# Altium PCB HandModule.PcbDoc
Units mil, origin at the board's own origin, x right, y up, seen from the top; angles counter-clockwise.
Board outline 1560 x 1180 mil, 2 copper layers (Top1, Bottom2), stack 63.824 mil thick; 53 components, 70 nets, 267 pads, 173 vias.
Unrouted connection lines stored in the file: 57.
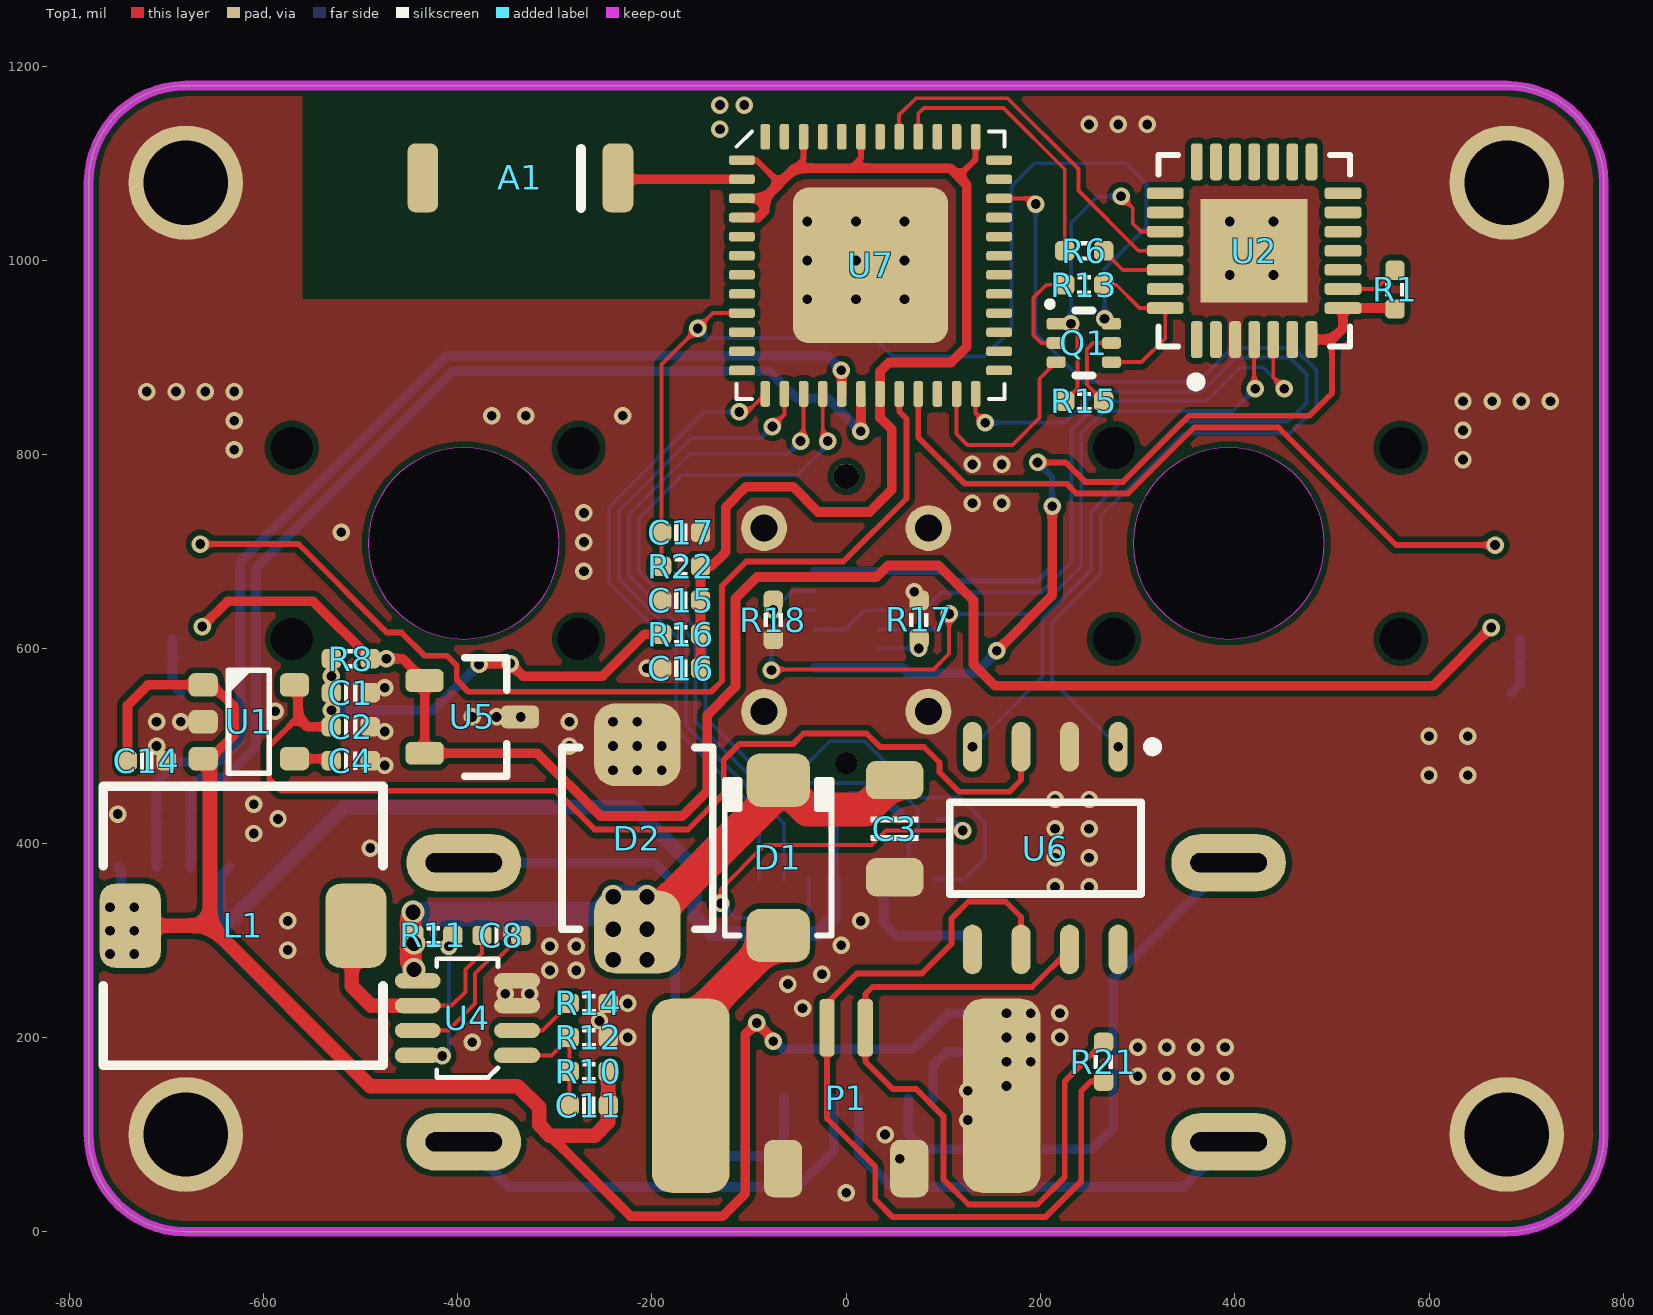
[diagram p0: Top1 view]
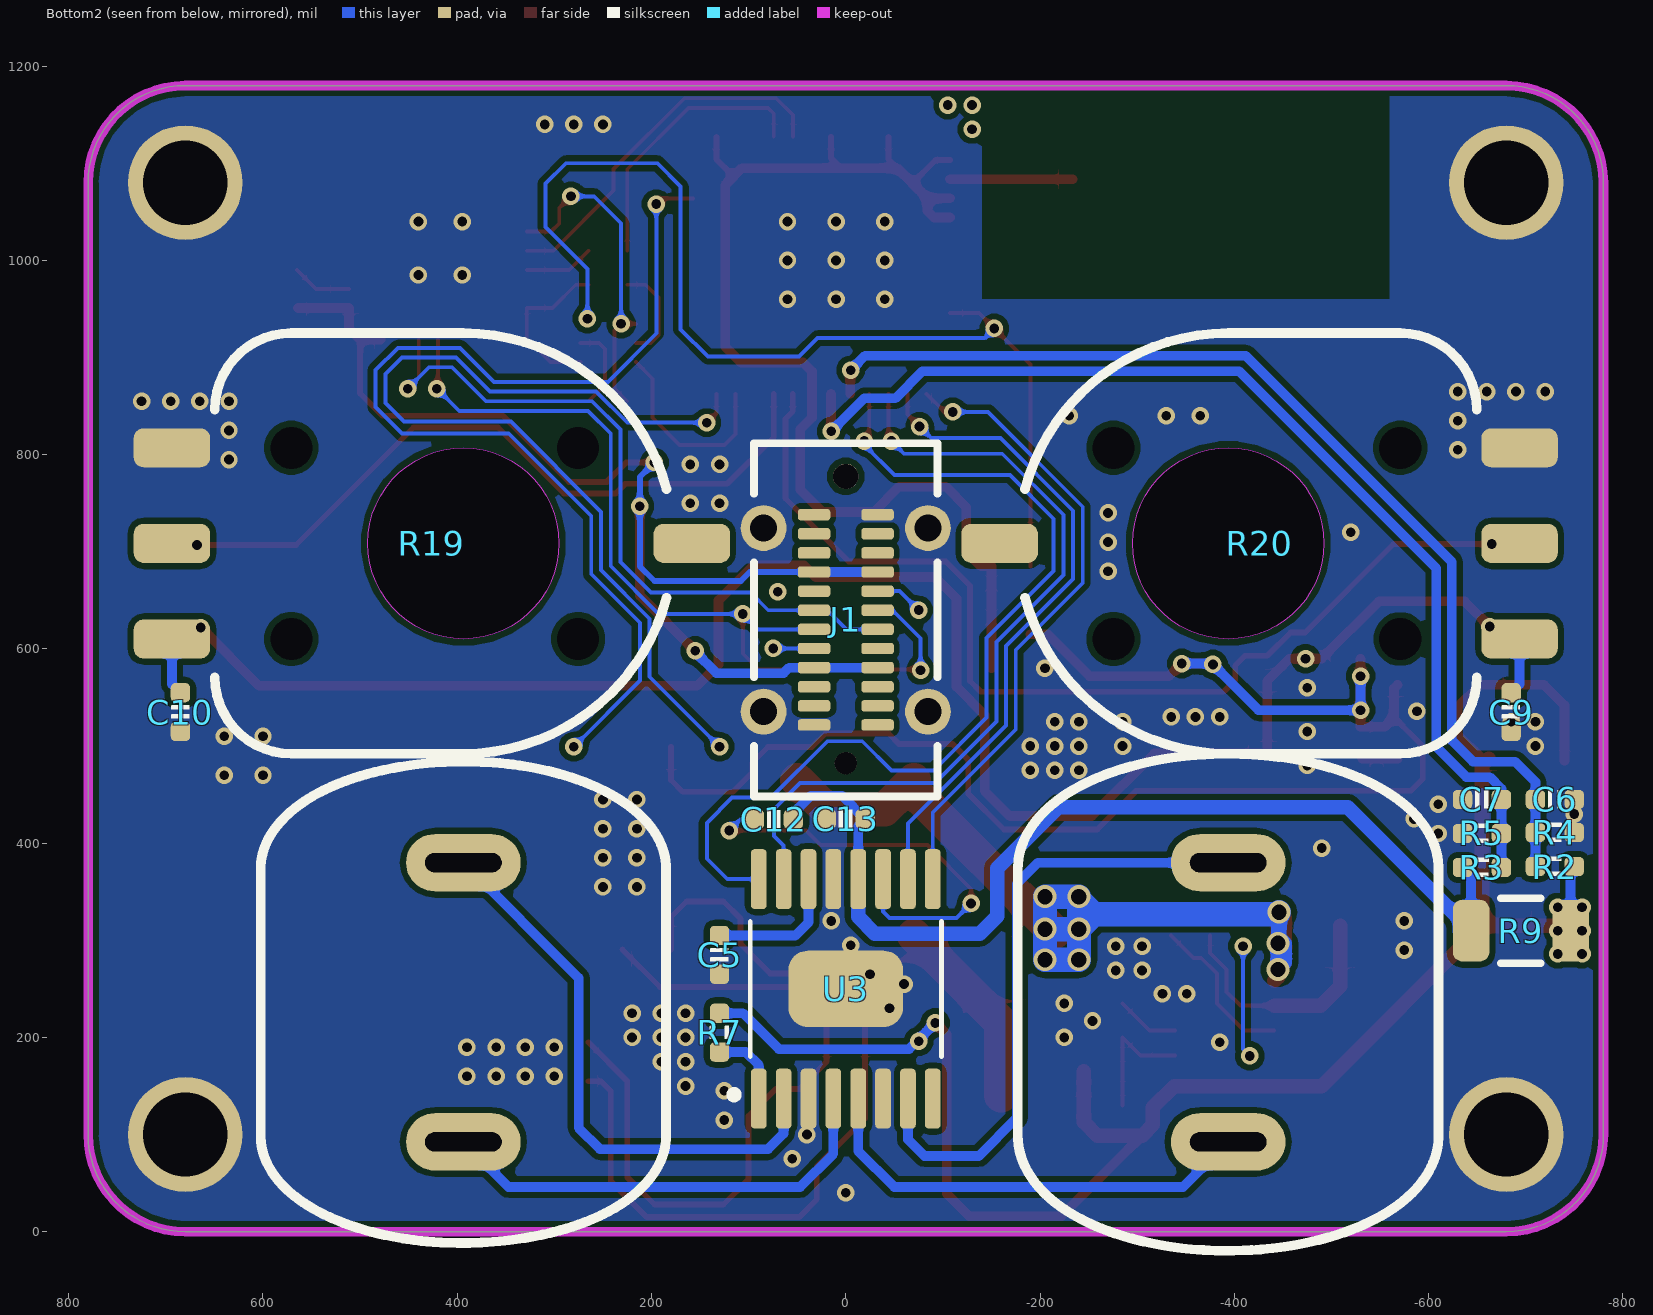
[diagram p1: Bottom2 view, seen from below]
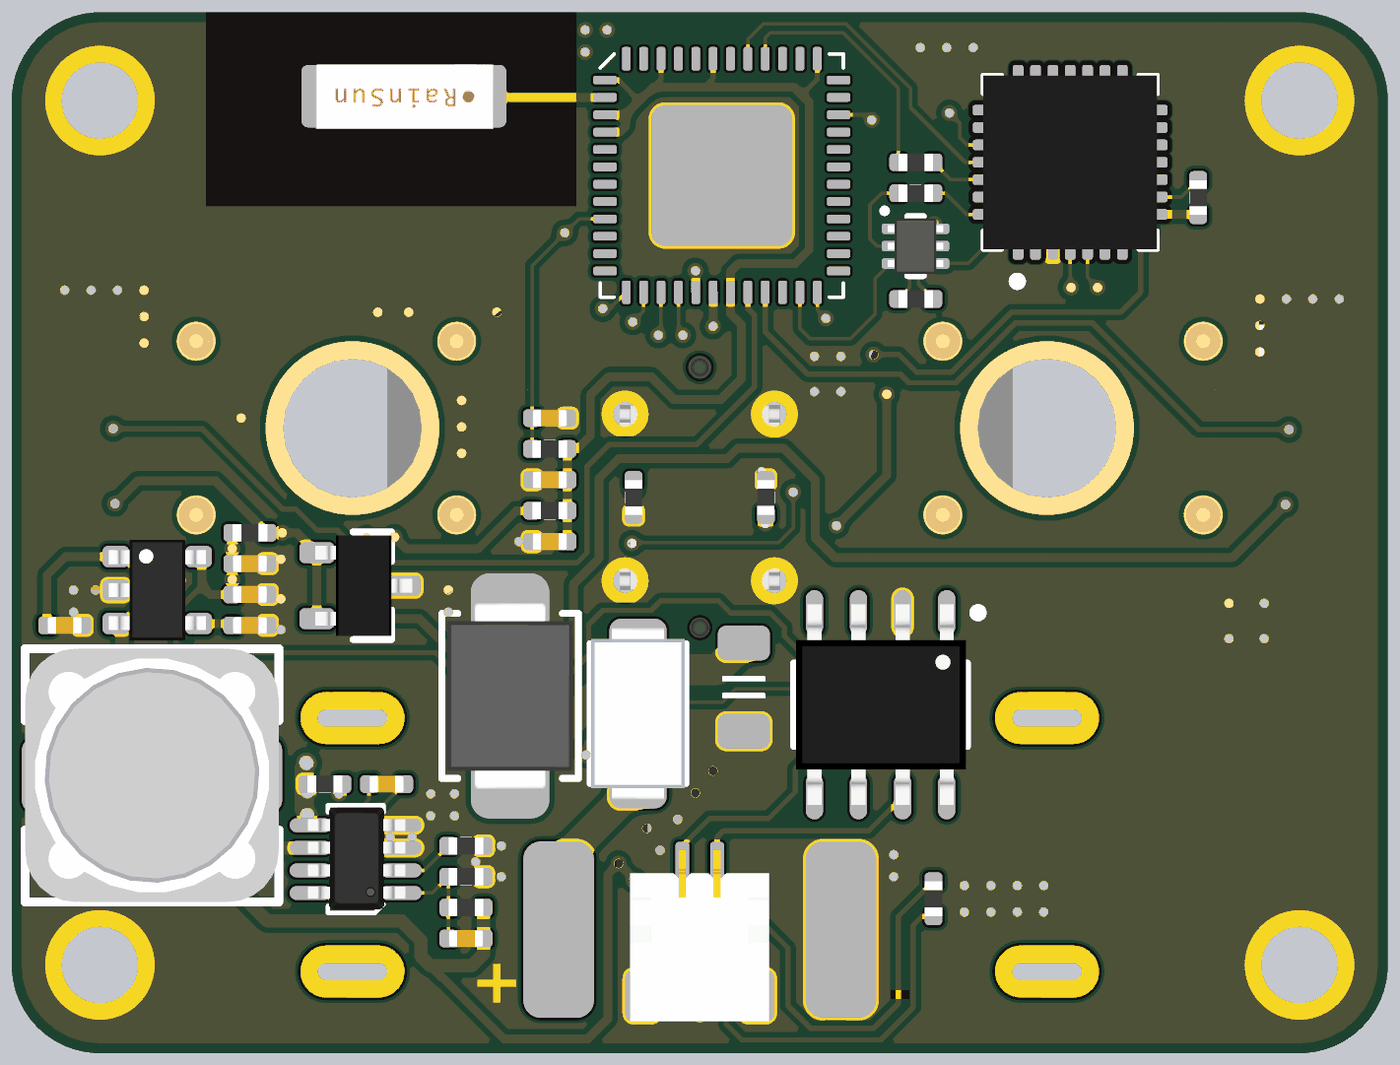
[diagram p2: 3D render of the assembled board from above, using the file's embedded part models]
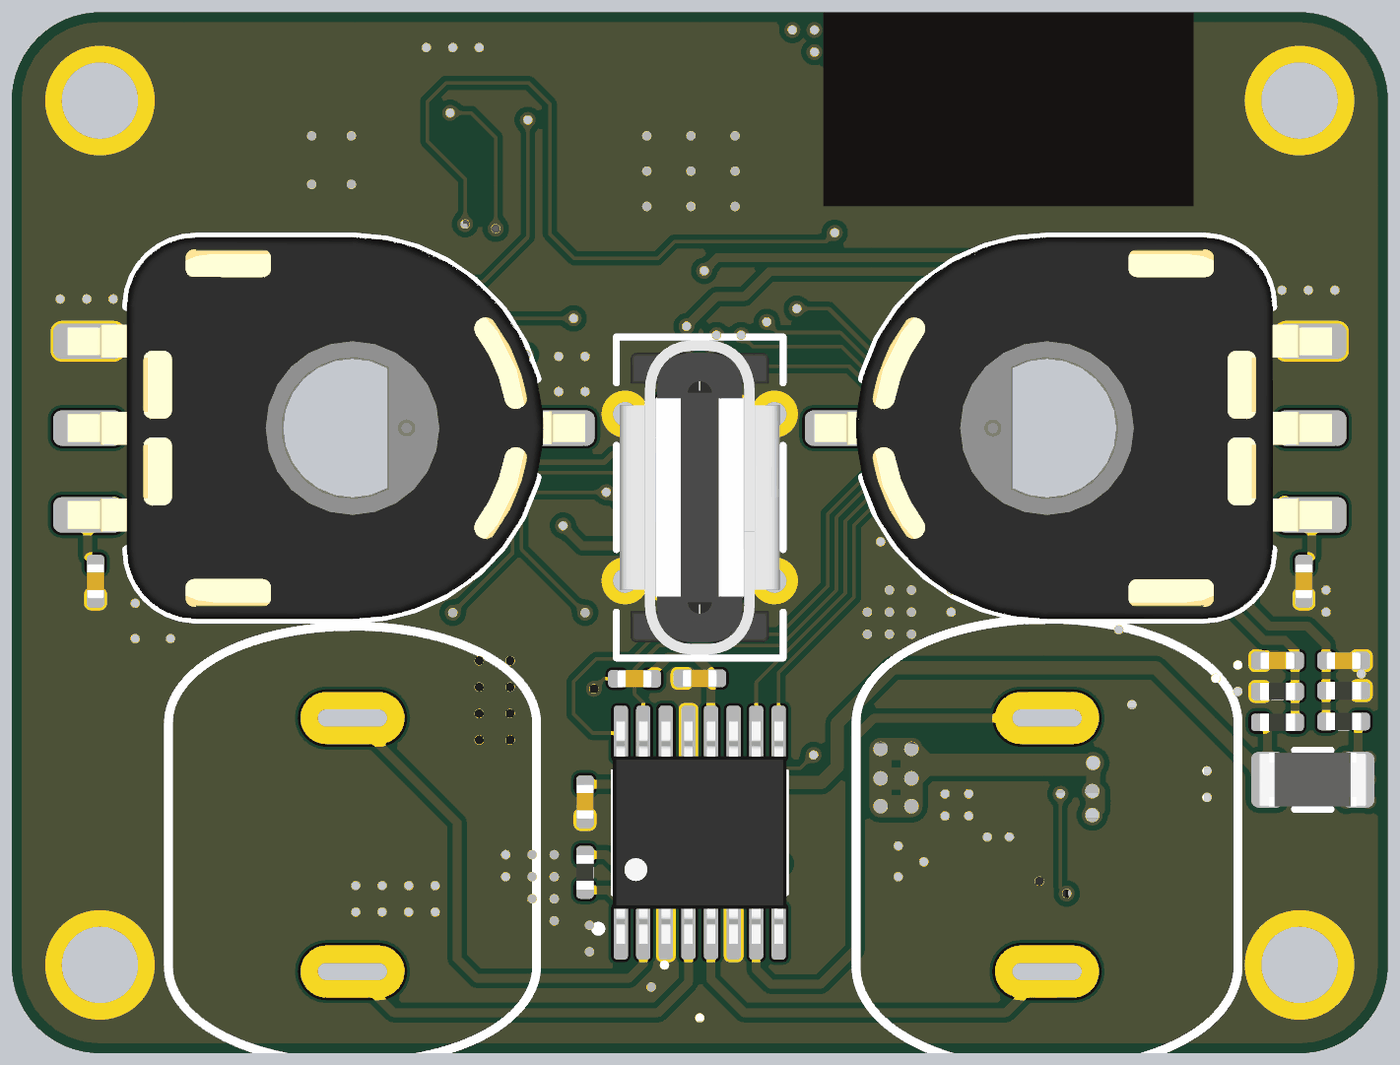
[diagram p3: 3D render of the assembled board from below, using the file's embedded part models]

## Layer stack, top to bottom
Top Solder: solder mask 0.4, Solder Resist, Dk 3.5
Top1: signal copper 1.4
Dielectric1: core 61.0236, FR-4, Dk 4.2
Bottom2: signal copper 1.4
Bottom Solder: solder mask 0.4, Solder Resist, Dk 3.5

## Board outline
-780,100 ccw(c-680,100) -680,0 680,0 ccw(c680,100) 780,100 780,1080 ccw(c680,1080) 680,1180 -680,1180 ccw(c-680,1080) -780,1080
cut-out: 295.28,708.66 ccw(c393.7,708.66) 393.7,610.24 ccw(c393.7,708.66) 492.13,708.66 ccw(c393.7,708.66) 393.7,807.09 ccw(c393.7,708.66)
cut-out: -492.13,708.66 ccw(c-393.7,708.66) -393.7,610.24 ccw(c-393.7,708.66) -295.28,708.66 ccw(c-393.7,708.66) -393.7,807.09 ccw(c-393.7,708.66)

## Design rules (kind name [scope] priority, off if disabled: settings)
Clearance Clearance_Logo [InNetClass('Logo')] p1: gap=8 ignorepadtopadclearanceinfootprint=FALSE
Clearance [All] p2: gap=6 ignorepadtopadclearanceinfootprint=FALSE
ComponentClearance [All] p1: gap=0 collisioncheckmode=3 verticalgap=0 showdistances=FALSE
DiffPairsRouting [All] p1: maxlimit=9 minlimit=9 mostfreqgap=9 toplayer_minwidth=15 toplayer_maxwidth=15 toplayer_prefwidth=15 bottomlayer_minwidth=15 bottomlayer_maxwidth=15 bottomlayer_prefwidth=15 maxuncoupledlength=500
FanoutControl Fanout_BGA [All] p1: bgadir=Out bgaviamode=Centered fanoutstyle=Auto fanoutdirection=Alternating viagrid=1 // Fanout_BGA (Default Rule)
HoleSize [All] p1: absolutevalues=TRUE maxlimit=10000 minlimit=8 maxpercent=80.000 minpercent=20.000
MinimumSolderMaskSliver [All] p1 off: minsoldermaskwidth=2
PlaneClearance [All] p1: clearance=8
PlaneConnect [All] p1: planeconnectstyle=Direct reliefexpansion=20 reliefentries=4 reliefconductorwidth=10 reliefairgap=10
PolygonConnect [All] p1: connectstyle=Direct reliefconductorwidth=10 reliefentries=4 polygonreliefangle="90 Angle" airgapwidth=10
RoutingVias [All] p1: holewidth=8 width=16 viastyle="Through Hole" minholewidth=6 minwidth=12 maxholewidth=28 maxwidth=50
SilkToSilkClearance [All] p1: silktosilkclearance=0
SilkToSolderMaskClearance [IsPad] p1: minsilkscreentomaskgap=0 clearancetoexposedcopper=TRUE
SolderMaskExpansion [All] p1: expansion=3 istentingtop=FALSE
Width Logo [InNetClass('Logo')] p1: maxlimit=100 minlimit=0.1 preferedwidth=10
Width GND [(InNet('AGND') OR InNet('GND'))] p2: maxlimit=50 minlimit=4 preferedwidth=10
Width VCC [(InNet('VDD_SYS_3.3V') OR InNet('VDD_AV_3.3V') OR InNet('VDD_5V') OR InNet('VDD1V2-SYS') OR InNet('VDD1V1-EPHY') OR InNet('VDD-CPUX') OR InNet('VDD-CPUS') OR InNet('VDD-CPUFB') OR InNet('VCC-DRAM'))] p3: maxlimit=50 minlimit=4 preferedwidth=10
Width [All] p4: maxlimit=10000 minlimit=4 preferedwidth=4
21 further rules are at their usual default settings.

## Components (designator, comment, footprint, x,y, rotation, side; value= is the part's Value field where it differs from the comment)
A1 "RAINSUN" ANT-Rainsun-AN5120 -335,1085 r180 top
C1 "0.1uF" CAP_0402 -510,555 r180 top value=0.1u
C2 "10uF" CAP_0402 -510,520 r180 top value=0.1u
C3 "100uF" 1206-CAP 50,415 r90 top value=0.1u
C4 "10nF" CAP_0402 -510,485 r180 top value=0.1u
C5 "2.2uF" CAP_0402 130,285 r90 bottom value=0.1u
C6 "10uF" CAP_0402 -730,445 r0 bottom value=0.1u
C7 "10uF" CAP_0402 -655,445 r180 bottom value=0.1u
C8 "10nF" CAP_0402 -355,305 r0 top value=0.1u
C9 "10uF" CAP_0402 -685,535 r90 bottom value=0.1u
C10 "10uF" CAP_0402 685,535 r90 bottom value=0.1u
C11 "12pF" CAP_0402 -265,130 r180 top value=0.1u
C12 "10nF" CAP_0402 74,424.5 r0 bottom value=0.1u
C13 "10uF" CAP_0402 0,425 r180 bottom value=0.1u
C14 "100uF" CAP_0402 -720,485 r180 top value=0.1u
C15 "10uF" CAP_0402 -170,650 r0 top value=0.1u
C16 "0.1uF" CAP_0402 -170,580 r0 top value=0.1u
C17 "1uF" CAP_0402 -170,720 r0 top value=0.1u
D1 "SS54" DO-214AC -70,385 r90 top
D2 "SMBJ28CA" SMBJ-CA_MFG -215,405 r270 top
J1 "USB-TYPE-C-STAND" USB-TYPE-C-STAND 0,630 r270 bottom locked
L1 "2.2uH" IND_CD74 -621,315 r180 top
P1 "SH1.0-2P" SH1.0-2P 0,210 r0 top
Q1 "BC847BVC-7" SOT563-6 244.63,915 r270 top
R1 "10K" RES_0402 565,970 r90 top value=22R
R2 "20K" RES_0402 -730,376 r180 bottom value=22R
R3 "20K" RES_0402 -655,375 r0 bottom value=22R
R4 "10K" RES_0402 -730,411 r0 bottom value=22R
R5 "10K" RES_0402 -655,410 r180 bottom value=22R
R6 "200R" RES_0402 245,1010 r0 top value=22R
R7 "47K" RES_0402 130,205 r90 bottom value=22R
R8 "120R" RES_0402 -510,590 r0 top value=22R
R9 "1R" 1206-RES -695,310 r180 bottom value=22R
R10 "110K" RES_0402 -265,165 r180 top value=22R
R11 "47K" RES_0402 -425,305 r0 top value=22R
R12 "15K" RES_0402 -265,200 r0 top value=22R
R13 "12K" RES_0402 245,975 r180 top value=22R
R14 "47K" RES_0402 -265,235 r0 top value=22R
R15 "12K" RES_0402 245,855 r0 top value=22R
R16 "0R" RES_0402 -170,615 r0 top value=22R
R17 "5.1K" RES_0402 75,630 r90 top value=22R
R18 "5.1K" RES_0402 -75,630 r270 top value=22R
R19 "ALPS-角度传感器" ALPS-角度传感器 393.7,708.66 r270 bottom locked
R20 "ALPS-角度传感器" ALPS-角度传感器 -393.7,708.66 r90 bottom locked
R21 "120R" RES_0402 265,175 r90 top value=22R
R22 "10K" RES_0402 -170,685 r180 top value=22R
U1 "LP2992 3V3" SOT23-5 -615,525 r0 top
U2 "CP2102" QFN-28 420,1010 r90 top value=Value
U3 "DRV8833PW" TSSOP-16 0,250 r90 bottom
U4 "SY8303" SOT23-8 -390,220 r90 top
U5 "TL431IDBZT" SOT23-3 -385,530 r0 top
U6 "SN65HVD232D" SO-8 205,395 r270 top
U7 "ESP32_SIP" QFN-48_7X7 25,995 r0 top

## Footprints (in the part's own frame and the unit in brackets; to place one, negate y for a bottom-side part, rotate by r counter-clockwise, add the part's x,y. Pads: shape width x height; smd on the part's side, far side on the other; paste and mask are expansions set on the pad)
1206-CAP [mm]
  rrect50% 1x1.5 smd: 1(-1.27,0) 2(1.27,0)
  silkscreen extent -0.3,-0.61 0.3,0.61, body extent -1.5,-0.75 1.5,0.75, height 1.5
1206-RES [mil]
  rrect50% 37.64x63.38 smd paste+0 mask+0: 1(-51.22,0) 2(51.22,0)
  silkscreen extent -21,-33 21,33, body extent -61,-31 61,31, height 26
ALPS-角度传感器 [mm]
  rrect50% 1.021x2 smd: 1(-2.5,-7.62) 2(0,-7.62) 3(2.5,-7.62) ""(0,5.976)
  round 0 hole 1.1: ""(-2.5,-4.5) ""(-2.5,3) ""(2.5,-4.5) ""(2.5,3)
  silkscreen extent -5.5,-6.5 5.5,5.31, body extent -5.5,-8.2 5.5,6.7, height 2.4
ANT-Rainsun-AN5120 [mm] "选择焊盘"
  rrect50% 0.8x1.8 smd: 1(-2.54,0) ""(2.563,0)
  silkscreen extent -1.57,-0.76 -1.57,0.79, body extent -2.57,-0.91 2.54,0.94, height 1.32
CAP_0402 [mil]
  rrect50% 20x20 smd: 1(-20,0) 2(20,0)
  silkscreen extent -7,-9 7,9, body extent -20,-10 20,10, height 20
DO-214AC [mil] "SMA"
  rrect50% 55x65 smd: 1(-80,0) 2(80,0)
  silkscreen extent -80,-55 80,55, body extent -98,-53 98,53, height 85
IND_CD74 [mm]
  rrect50% 1.6x2.2 smd: 1(-2.95,0) 2(2.95,0)
  silkscreen extent -3.66,-3.65 3.66,3.65, body extent -3.65,-3.65 3.65,3.65, height 4.19
QFN-28 [mil]
  rrect50% 38x12 smd mask+5: 1(-91.5,59.06) 2(-91.5,39.37) 3(-91.5,19.68) 4(-91.5,0) 5(-91.5,-19.69) 6(-91.5,-39.37) 7(-91.5,-59.06) 15(91.5,-59.06) 16(91.5,-39.37) 17(91.5,-19.69) 18(91.5,0) 19(91.5,19.68) 20(91.5,39.37) 21(91.5,59.06)
  rrect50% 12x38 smd mask+5: 8(-59.06,-91.5) 9(-39.37,-91.5) 10(-19.68,-91.5) 11(0,-91.5) 12(19.69,-91.5) 13(39.37,-91.5) 14(59.06,-91.5) 22(59.06,91.5) 23(39.37,91.5) 24(19.69,91.5) 25(0,91.5) 26(-19.68,91.5) 27(-39.37,91.5) 28(-59.06,91.5)
  rect 106.3x110.24 smd: 29(0,0)
  silkscreen extent -140,-98 98,98, body extent -98,-98 98,98, height 35
QFN-48_7X7 [mm]
  rrect50% 0.675x0.25 smd: 1(-3.363,2.75) 2(-3.363,2.25) 3(-3.363,1.75) 4(-3.363,1.25) 5(-3.363,0.75) 6(-3.363,0.25) 7(-3.363,-0.25) 8(-3.363,-0.75) 9(-3.363,-1.25) 10(-3.363,-1.75) 11(-3.363,-2.25) 12(-3.363,-2.75) 25(3.363,-2.75) 26(3.363,-2.25) 27(3.363,-1.75) 28(3.363,-1.25) 29(3.363,-0.75) 30(3.363,-0.25) 31(3.363,0.25) 32(3.363,0.75) 33(3.363,1.25) 34(3.363,1.75) 35(3.363,2.25) 36(3.363,2.75)
  rrect50% 0.25x0.675 smd: 13(-2.75,-3.363) 14(-2.25,-3.363) 15(-1.75,-3.363) 16(-1.25,-3.363) 17(-0.75,-3.363) 18(-0.25,-3.363) 19(0.25,-3.363) 20(0.75,-3.363) 21(1.25,-3.363) 22(1.75,-3.363) 23(2.25,-3.363) 24(2.75,-3.363) 37(2.75,3.363) 38(2.25,3.363) 39(1.75,3.363) 40(1.25,3.363) 41(0.75,3.363) 42(0.25,3.363) 43(-0.25,3.363) 44(-0.75,3.363) 45(-1.25,3.363) 46(-1.75,3.363) 47(-2.25,3.363) 48(-2.75,3.363)
  rrect20% 4.064x4.064 smd: 49(0,0)
  silkscreen extent -3.5,-3.5 3.5,3.5, body extent -3.5,-3.5 3.5,3.5, height 1
RES_0402 [mil]
  rrect50% 20x20 smd: 1(-20,0) 2(20,0)
  silkscreen extent -7,-10 7,10, body extent -20,-10 20,10, height 14
SH1.0-2P [mm]
  rrect50% 0.4x1.5 smd: 1(-0.5,0) 2(0.5,0)
  rrect50% 1x1.5 smd: SH1(-1.651,-3.683) SH2(1.651,-3.683)
  body extent -2,-4.42 2,0.54, height 3.06
SMBJ-CA_MFG [mm]
  rrect50% 2.16x2.26 smd paste+0 mask+0: 1(-2.45,0) 2(2.45,0)
  silkscreen extent -2.37,-1.97 2.37,1.97, body extent -2.7,-1.81 2.7,1.81, height 2.62
SO-8 [mm]
  oval 1.3x0.5 smd: 1(-2.65,1.905) 2(-2.65,0.635) 3(-2.65,-0.635) 4(-2.65,-1.905) 5(2.65,-1.905) 6(2.65,-0.635) 7(2.65,0.635) 8(2.65,1.905)
  silkscreen extent -2.77,-2.5 1.2,2.93, body extent -2.89,-2.44 2.89,2.46, height 1.45
SOT23-3 [mm] "SOT23, 3-Leads, Body 3.1x3.0mm (max), Pitch 0.95mm, IPC Medium Density"
  rrect50% 1x0.6 smd: 1(-1.246,0.95) 2(-1.246,-0.95) 3(1.246,0)
  silkscreen extent -0.2,-1.55 0.9,1.55, body extent -1.3,-1.45 1.5,1.45, height 1.2
SOT23-5 [mil]
  rrect50% 30x24 smd: 1(-47,38) 2(-47,0) 3(-47,-38) 4(47,-38) 5(47,38)
  silkscreen extent -21,-53 21,53, body extent -55,-57 55,57, height 57
SOT23-8 [mm]
  oval 0.4x1.2 smd: 1(-0.975,-1.3) 2(-0.325,-1.3) 3(0.325,-1.3) 4(0.975,-1.3) 5(0.975,1.3) 6(0.325,1.3) 7(-0.325,1.3) 8(-0.975,1.3)
  silkscreen extent -1.55,-0.8 1.55,0.8, body extent -1.44,-1.43 1.5,1.37, height 1.2
SOT563-6 [mm]
  rrect50% 0.305x0.5 smd paste+0 mask+0: 1(-0.5,-0.723) 2(0,-0.723) 3(0.5,-0.723) 4(0.5,0.723) 5(0,0.723) 6(-0.5,0.723)
  silkscreen extent -1.09,-0.96 0.85,0.23, body extent -0.8,-0.8 0.8,0.8, height 0.6
TSSOP-16 [mm]
  rrect50% 1.57x0.41 smd: 1(-2.87,2.275) 2(-2.87,1.625) 3(-2.87,0.975) 4(-2.87,0.325) 5(-2.87,-0.325) 6(-2.87,-0.975) 7(-2.87,-1.625) 8(-2.87,-2.275) 9(2.87,-2.275) 10(2.87,-1.625) 11(2.87,-0.975) 12(2.87,-0.325) 13(2.87,0.325) 14(2.87,0.975) 15(2.87,1.625) 16(2.87,2.275)
  rrect50% 2x3 smd: PAD(0,0)
  silkscreen extent -2.87,-2.5 1.77,3.02, body extent -3.2,-2.5 3.2,2.5, height 1.2
USB-TYPE-C-STAND [mm]
  rrect50% 0.3x0.85 smd: A1(-2.75,0.83) A2(-2.25,0.83) A3(-1.75,0.83) A4(-1.25,0.83) A5(-0.75,0.83) A6(-0.25,0.83) A7(0.25,0.83) A8(0.75,0.83) A9(1.25,0.83) A10(1.75,0.83) A11(2.25,0.83) A12(2.75,0.83) B1(2.75,-0.83) B2(2.25,-0.83) B3(1.75,-0.83) B4(1.25,-0.83) B5(0.75,-0.83) B6(0.25,-0.83) B7(-0.25,-0.83) B8(-0.75,-0.83) B9(-1.25,-0.83) B10(-1.75,-0.83) B11(-2.25,-0.83) B12(-2.75,-0.83)
  round 1.2 hole 0.7: S1(-2.4,2.15) S2(2.4,2.15) S3(-2.4,-2.15) S4(2.4,-2.15)
  round 0.66 hole 0.66 unplated: ""(-3.75,0)
  round 0.58 hole 0.58 unplated: ""(3.75,0)
  silkscreen extent -4.62,-2.4 4.62,2.4, body extent -4.52,-2.3 4.52,2.3, height 7.39

## Part data
A1: library part ANT-Rainsun-AP5120
C1 C2 C4 C5 C6 C7 C8 C9 C10 C11 C12 C13 C14 C15 C16 C17: library part 电容-0402, "Capacitor"
C3: library part 电容-1206, "Capacitor"
D1: library part Diode_SMA, "Diode", Type=SMA
J1: Package=None, Availability=Unavailable, DigiKey-Purchase-URL=https://snapeda.com/shop?store=DigiKey&id=3596593, MF="Wurth Electronics", MP=632722110112, Price=None, SnapEDA_Link=https://www.snapeda.com/parts/632722110112/Wurth%20Electronics%20Inc./view-part/3596593/?ref=snap
L1: library part 电感
R1 R2 R3 R4 R5 R6 R7 R8 R10 R11 R12 R13 R14 R15 R16 R17 R18 R21 R22: library part 电阻-0402, "Resistor"
R9: library part 电阻-1206, "Resistor"
U1: library part LP2992, "LDO"
U2: "USB转TTL", MFG #1="SILICON LABS", PART DESC="SINGLE-CHIP USB TO UART BRIDGE, QFN28, RoHS.", PART NUMBER=CP2102, RefDes=RefDes, Type=DEV
U4: "DC-DC", Manufacturer="Linear Technology", PartNumber=LT3469ETS8#TRMPBF, Code_JEDEC=MO-193, ComponentLink1Description="Manufacturer URL", ComponentLink1URL=http://www.linear.com/, ComponentLink2Description=Datasheet, ComponentLink2URL=http://cds.linear.com/docs/en/datasheet/3469f.pdf, ComponentLink3Description="Package Specification", ComponentLink3URL=http://cds.linear.com/docs/en/packaging/SOT_8_05-08-1637.pdf, Mounting Technology="Surface Mount", Number of Outputs=1, PackageDescription="8-Pin Plastic TSOT-23, Body 2.9 x 1.63 mm, Pitch 0.65 mm", PackageReference=TS8-8, PackageVersion="Rev. A, 08/2010", Packing="Mini Tape and Reel", RoHS=TRUE
U5: "Adjustable precision shunt regulator 3-SOT-23 -40 to 85", Package="SOT-23-3 Texas Instruments", Availability=Warning, Check_prices=https://www.snapeda.com/parts/TL431IDBZT/Texas%20Instruments/view-part/1206577/?ref=eda, MF="Texas Instruments", MP=TL431IDBZT, Price=None, Purchase-URL=https://pricing.snapeda.com/search/part/TL431IDBZT/?ref=eda, SnapEDA_Link=https://www.snapeda.com/parts/TL431IDBZT/Texas%20Instruments/view-part/1206577/?ref=snap
U6: Manufacturer="Texas Instruments", Manufacturer Part Number=SN65HVD232DR, Operating Temperature="-40°C ~ 85°C", Package / Case="8-SOIC (0.154\", 3.90mm Width)", Supplier Device Package=8-SOIC, Supplier Part Number 1=296-26344-2-ND, Voltage - Supply="3 V ~ 3.6 V", Category="Integrated Circuits (ICs)", ComponentLink1Description=http://www.ti.com/lit/ds/symlink/sn65hvd230.pdf, ComponentLink1URL=http://www.ti.com/lit/ds/symlink/sn65hvd230.pdf, Data Rate=1Mbps, Duplex=Half, Mounting Type="Surface Mount", Number of Drivers/Receivers=1/1, Packaging="Tape & Reel (TR)", Part Status=Active, Pricing 1="2500=0.84375 (USD)", Pricing 2="1=2.05, 10=1.842, 100=1.4809, 500=1.21668, 1000=1.00811 (USD)", Protocol=CAN, RoHS="RoHS Compliant", Stock=5000, Supplier 1=Digi-Key, Supplier 2=Digi-Key, Supplier Part Number 2=296-26344-1-ND, Type=Transceiver
U7: library part ESP32-PICO
R19 R20: ComponentLink1Description="Manufacturer Link", ComponentLink1URL=http://bourns.com/2/search.html, DatasheetVersion=Oct-2003, PackageDescription="Square Trimming Potentiometer", PackageReference=POT4MM-2, Published=17-Dec-2003, Publisher="Altium Limited"
U3: SnapEDA_Link=https://www.snapeda.com/parts/DRV8833PW/Texas%20Instruments/view-part/507725/?ref=snap

## Free pads (board coordinates)
  round 118.11 hole 86.61: ""(-680,100) ""(-680,1080) ""(680,100) ""(680,1080)
  oval 118.11x59.06 hole 19.68 slot 78.74 at 0 deg: ""(-393.7,92.52) ""(-393.7,379.92) ""(393.7,92.52) ""(393.7,379.92)
  rrect50% 80x200 smd: ""(-160,140) ""(160,140)

## Via types
v1: diameter 18, hole 10, Top1 to Bottom2, tented both sides, 164 vias
v2: diameter 23.62, hole 15.75, Top1 to Bottom2, tented both sides, 9 vias

## Nets (pads, with @x,y where several pads share a name; then routed paths per layer and width w, separated by ;. In a path a pad name is that pad's centre, name@x,y a point inside that pad or via, vN(x,y) a via of type N, cw(c..) or ccw(c..) an arc to the next point about the centre after c; other vN are vias at no path point)
3V3A: C15.2 C16.2 R16.2 R22.1 U7.1 U7.3 U7.4 U7.19 U7.37 U7.43 U7.46 | length 1236.7
  Top1 w6: U7.1 -92.37,1103.27 -68.55,1079.45 ; -53,1095 -43.9,1104.1 U7.46 ; 5,1095 15.16,1105.16 U7.43 ; 115.5,1086.5 133.27,1104.27 U7.37
  Top1 w10: C16.2 R16.2 C15.2 R22.1 -139,685 -124,700 -124,746 -103,767 -55,767 -29,741 24,741 47,764 47,826 34.84,838.16 U7.19 34.84,885.84 44,895 108,895 124,911 124,1078 115.5,1086.5 107,1095 5,1095 -53,1095 -68.55,1079.45 -84.1,1063.9 ; U7.4 -90.79,1044.21 -84.1,1050.9 -84.1,1063.9 ; U7.3 -84.1,1063.9
BOOT_1: Q1.3 U7.23 | length 207.4
  Top1 w4: U7.23 113.58,821.42 125,810 171,810 199,838 199,878.15 Q1.3
CAN_D_1: U6.1 U7.34 | length 1099.8
  Top1 w4: U7.34 189.1,1063.9 v1(195,1058)
  Bottom2 w4: v1(195,1058) 195,925 245,875 362,875 397,910 461.14,910 484,887.14 484,849 457,822 347,822 262,737 262,677 212,627 212,567.33 v1(280,499.33)
CAN_H_1: P1.2 R21.2 U6.7 | length 770.3
  Top1 w6: U6.7 191.33,252 27,252 19.69,244.69 P1.2 19.69,175.32 48,147 72,147 100,119 100,54 126,28 197,28 225,56 225,155 R21.2
CAN_L_1: P1.1 R21.1 U6.6 | length 876.1
  Top1 w6: U6.6 180,324 164,340 126,340 108.27,322.27 108.27,296.27 78,266 11,266 -19.69,235.31 P1.1 -19.69,116.69 29.9,67.1 29.9,33.1 48,15 205,15 242,52 242,145 252,155 R21.1
CAN_R_1: U6.4 U7.24 | length 990
  Top1 w4: U7.24 133.27,842.73 v1(143,833)
  Bottom2 w4: v1(130,499.33) 202,571.33 202,631.14 252,681.14 252,741.14 344.86,834 454.86,834 474,853.14 474,883 457,900 401.14,900 366.14,865 257,865 225,833 v1(143,833)
CP_Rx_1: U2.25 U7.41 | length 381.3
  Top1 w4: U7.41 54.53,1149.53 72,1167 166,1167 239,1094 239,1072 301,1010 U2.25
CP_Tx_1: R6.1 U7.40 | length 287
  Top1 w4: U7.40 74.21,1151.21 80,1157 161.86,1157 225,1093.86 R6.1
DTR_1: Q1.4 R13.1 U2.28 | length 170.2
  Top1 w4: R13.1 278,975 302.06,950.94 U2.28 328.5,919.8 304.01,895.32 Q1.4
ESP_EN_1: C17.1 Q1.6 R22.2 U7.9 | length 1120.5
  Top1 w4: R22.2 C17.1 -190,893 v1(-153,930) -137.21,945.79 U7.9
  Bottom2 w4: v1(-153,930) -143,920 29,920 48,901 142,901 170,929 170,1076 194,1100 288,1100 309,1079 309,1034.32 266,991.32 v1(266,940)
FLASH_CLK_1: U7.31
FLASH_CS_1: U7.25
FLASH_SD0_1: U7.27
FLASH_SD1_1: U7.33
FLASH_SD2_1: U7.30
FLASH_SD3_1: U7.32
GND: C1.1 C2.1 C3.1 C4.1 C5.1 C6.1 C7.1 C9.1 C10.1 C13.1 C14.1 C15.1 C16.1 C17.2 D2.1 J1.A1 J1.B1 J1.S1 J1.S2 J1.S3 J1.S4 P1.SH1 P1.SH2 pad.@160,140 pad.@680,100 pad.@680,1080 pad.@-680,100 pad.@-680,1080 R4.1 R5.1 R12.2 R14.2 R17.2 R18.2 R19.1 R20.3 U1.2 U2.3 U2.29 U3.3 U3.6 U3.13 U3.PAD U4.3 U4.4 U5.3 U6.2 U7.49
  other v1: 0,40 55,75 40,100 125,115 125,145 165,150 300,160 330,160 360,160 390,160 165,175 190,175 300,190 330,190 360,190 390,190 -385,195 -225,200 165,200 190,200 220,200 -254,217 165,225 190,225 220,225 -45,230 -225,235 -351,245 -326,245 -60,255 -25,265 -305,269 -278,269 -575,290 -305,294 -278,294 -5,295 -575,320 15,320 215,355 250,355 215,385 250,385 -490,395 -610,410 215,415 250,415 -585,425 -750,430 -610,440 215,445 250,445 600,470 640,470 -240,475 -215,475 -190,475 -475,480 -710,500 -285,500 -240,500 -215,500 -190,500 600,510 640,510 -475,515 -710,525 -685,525 -285,525 -240,525 -215,525 -385,530 -360,530 -335,530 -588,536 -475,560 -205,580 70,659 -270,680 -270,710 -520,720 -270,740 130,750 160,750 130,790 160,790 635,795 -630,805 635,825 -630,835 -365,840 -330,840 -230,840 635,855 665,855 695,855 725,855 -720,865 -690,865 -660,865 -630,865 -40,960 10,960 60,960 395,985 440,985 -40,1000 10,1000 60,1000 -40,1040 10,1040 60,1040 395,1040 440,1040 250,1140 280,1140 310,1140
GPIO2_1: U7.22
GPIO9_1: U7.28
GPIO10_1: U7.29
GPIO12_1: C7.2 R3.1 R5.2 U7.18 | length 1121
  Top1 w10: v1@15.16,824.16 U7.18
  Bottom2 w10: R3.1 R5.2 C7.2 -675,456 -663,468 -639,468 -608,499 -608,683 -405,886 -79,886 -51,858 -19,858 v1(15,824)
GPIO13_1: R20.2 U7.20 | length 1049.3
  Top1 w6: v1(-665,708) -564,708 -473,617 -458,617 -434,593 -411,593 -401,583 -401,568 -389,556 -139,556 -128,567 -128,665 -103,690 -3,690 62,755 62,837 54.53,844.47 U7.20
GPIO14_1: C6.2 R2.1 R4.2 U7.17 | length 1111.7
  Top1 w10: U7.17 v1@-4.53,886.53
  Bottom2 w10: R2.1 R4.2 C6.2 -710,463 -689,484 -645.63,484 -624,505.63 -624,689.63 -411.63,902 -20,902 v1(-5,887)
GPIO15_1: R19.2 U7.21 | length 740.8
  Top1 w6: U7.21 74.21,817.79 122,770 227,770 237,760 290,760 358,828 445,828 566,707 v1(668,707)
GPIO18_1: U7.35
GPIO19_1: U7.38
GPIO21_1: U7.42
GPIO22_1: U7.39
GPIO23_1: U7.36
GPIO25_1: U3.10 U7.14 | length 682.4
  Top1 w4: v1(-76,829) -63.58,841.42 U7.14
  Bottom2 w4: v1(-76,829) -88,817 -159.28,817 -234,742.28 -234,672.14 -165,603.14 -165,521.14 -63.98,420.12 U3.10
GPIO26_1: U3.15 U7.15 | length 842.3
  Top1 w4: v1(-47,814) -43.9,817.1 U7.15
  Bottom2 w4: v1(-47,814) -60,801 -161.14,801 -224,738.14 -224,676.28 -155,607.28 -155,525.28 -91.72,462 47,462 74,435 74,407.5 63.98,397.48 U3.15
GPIO27_1: U3.16 U7.16 | length 971.3
  Top1 w4: U7.16 -24.21,819.21 v1(-19,814)
  Bottom2 w4: v1(-19,814) -19,810 -50,779 -169,779 -214,734 -214,680.43 -145,611.43 -145,529.43 -90.57,475 -47,475 -17,505 19,505 77,447 117,447 143,421 143,384 121.99,362.99 U3.16
GPIO32_1: U7.12
GPIO33_1: U3.9 U7.13 | length 656.3
  Top1 w4: v1(-110,844) -101.89,844 U7.13
  Bottom2 w4: v1(-110,844) -146.43,844 -244,746.43 -244,668 -175,599 -175,517 -89.57,431.57 U3.9
GPIO34_1: U7.10
GPIO35_1: U7.11
GPIO37_1: U7.6
GPIO38_1: U7.7
MOTOR_A_1_1: pad.@393.7,379.92 U3.2 | length 584.8
  Bottom2 w10: U3.2 63.98,101.02 80,85 253,85 275,107 275,261.22 pad.@393.7,379.92
MOTOR_A_2_1: pad.@393.7,92.52 U3.4 | length 471.1
  Bottom2 w10: U3.4 12.8,80.2 47,46 347.18,46 pad.@393.7,92.52
MOTOR_B_1_1: pad.@-393.7,379.92 U3.7 | length 645
  Bottom2 w10: pad.@-393.7,379.92 -197.92,379.92 -176,358 -176,117 -137,78 -81,78 -63.98,95.02 U3.7
MOTOR_B_2_1: pad.@-393.7,92.52 U3.5 | length 469.4
  Bottom2 w10: pad.@-393.7,92.52 -347.18,46 -50,46 -12.8,83.2 U3.5
NetA1_1: A1.1 U7.2 | length 126.2
  Top1 w10: A1.1@-233.58,1083.58 U7.2
NetC4_2: C4.2 U1.4 | length 36
  Top1 w10: U1.4 C4.2@-532,487
NetC5_2: C5.2 U3.14 | length 141.6
  Bottom2 w10: U3.14 38.39,318.61 52,305 C5.2
NetC8_1: C8.1 L1.1 U4.6 | length 258.2
  Top1 w4: U4.6 -406.2,232.8 -392,247 -392,270.14 -375,287.14 C8.1
  Top1 w15: L1.1@-508.86,315 -508.86,252.86 -488.8,232.8 U4.6
NetC8_2: C8.2 U4.7 | length 164.8
  Top1 w4: U4.7 -409.8,207.2 -382,235 -382,266 -366,282 -358,282 C8.2
NetC11_2: C11.2 R10.2 R12.1 U4.1 | length 131.4
  Top1 w4: U4.1 -303.39,181.61 R12.1 R10.2 C11.2
NetC12_2: C12.2 U3.11 | length 452.6
  Top1 w4: v1(-129,338) -129,353 -84,398 26,398 41,413 v1(120,413)
  Bottom2 w4: v1(-129,338) -114,323 -45,323 -38.39,329.61 U3.11 ; C12.2 108.5,424.5 v1(120,413)
NetJ1_A5: J1.A5 R18.1 | length 50.4
  Bottom2 w4: v1(-75,640) -55.47,659.53 J1.A5
NetJ1_B5: J1.B5 R17.1 | length 41.9
  Bottom2 w4: J1.B5 v1(74.53,600.47)
NetQ1_2: Q1.2 R13.2 | length 102.9
  Top1 w4: Q1.2 201,915 193,923 193,962 206,975 R13.2
NetQ1_5: Q1.5 R15.2 | length 88.6
  Top1 w4: R15.2 248,872 248,909 254,915 Q1.5
NetR1_2: R1.2 U2.9 | length 61.5
  Top1 w4: U2.9 545.63,970.63 R1.2
NetR6_2: R6.2 U2.26 | length 71.7
  Top1 w4: R6.2 284.69,990.32 U2.26
NetR7_1: R7.1 U3.1 | length 80.6
  Bottom2 w10: U3.1 89.57,171.57 103,185 R7.1
NetR11_2: R11.2 U4.8 | length 115.9
  Bottom2 w4: v1(-416,181) -409,188 v1(-409,294)
NetR14_1: R14.1 U4.2 | length 65.3
  Top1 w4: U4.2 -312.8,207.2 R14.1
RTS_1: Q1.1 R15.1 U2.24 | length 339.7
  Top1 w4: Q1.1 v1(231.32,934.69) 238,928 238,868 R15.1 ; v1(283,1066) 295,1054 295,1038 303.32,1029.69 U2.24
  Bottom2 w4: v1(231.32,934.69) 231.32,1038.32 259,1066 v1(283,1066)
SENSE_1_N: C12.1 C13.2 R3.2 R9.1 U3.12 | length 1043.6
  Bottom2 w10: R9.1 -643.78,366.23 R3.2 ; U3.12 -12.8,417.8 C13.2 4,449 36,449 54,431 C12.1
  Bottom2 w15: R9.1 -516.78,437 -219,437 -156,374 -156,325 -138,307 -30,307 -12.8,324.2 U3.12
SENSOR_VN_1: U7.8
SENSOR_VP_1: U7.5
USB_ESP_DM_1: J1.A7 J1.B7 U2.5 | length 739.7
  Top1 w4: U2.5 439.69,879.32 v1(451,868)
  Bottom2 w4: J1.A7 -0.84,620.16 18.84,639.84 J1.B7 79.84,639.84 98,658 200.57,658 232,689.43 232,825.86 261.14,855 370.28,855 405.28,890 429,890 v1(451,868)
USB_ESP_DP_1: J1.A6 J1.B6 U2.4 | length 940.7
  Top1 w4: v1(-77,578) -76,579 90,579 106,595 v1(106,636) ; v1@420,869 U2.4
  Bottom2 w4: v1(-77,578) -77,611 -48.16,639.84 -39.16,639.84 J1.A6 ; J1.B6 90.16,620.16 v1(106,636) 192.72,636 242,685.28 242,821.72 265.28,845 398,845 v1(421,868)
VCC: C3.2 D1.2 D2.2 R11.1 U4.5 | length 1052.1
  Top1 w15: v2(-445,297) -445,277 v2(-445,270) ; R11.1 -445,323 -445,328 v2(-446,329) -452,323 -452,297 -452,277 v2(-445,270) ; U4.5 -445,262.2 v2(-445,270)
  Top1 w35: D2.2 -70,453.54 D1.2 -39.84,434.84 19.84,434.84 C3.2
  Bottom2 w15: v2(-446,329) -446,303 -452,297 -452,277 v2(-445,270) -445,277 v2(-445,297)
  Bottom2 w25: v2(-446,329) -444,327 -255.5,327 ; -255.5,327 v2@-240,342.5 ; -255.5,327 v2(-240,311.5) ; v2(-240,311.5) v2(-205,311.5) ; v2(-240,311.5) v2@-240,342.5 ; v2(-240,311.5) v2(-240,280) v2(-205,280) v2(-205,311.5) ; v2@-240,342.5 v2(-240,345) v2(-205,345) v2(-205,311.5)
VCC_3V3: C1.2 C2.2 R8.1 R16.1 U1.5 U6.3 | length 1596.7
  Top1 w6: -564.5,529.5 -594,500 -594,466 -582,454 -299,454 -259,414 -163,414 -126,451 -126,486 -110,502 -55,502 -44,513 21,513 35,499 80,499 96,483 96,473 116,453 168,453 180,465 U6.3
  Top1 w10: U1.5 -564.5,559.5 -564.5,529.5 -555,520 C2.2 v1(-530,537) C1.2 v1(-530,572) R8.1 ; v1(-378,584) -377,585 v1(-346,585) -333,572 -251,572 -208,615 R16.1
  Bottom2 w10: v1(-530,572) v1(-530,537) -425,537 v1(-378,584) -377,585 v1(-346,585)
VCC_5V: C11.1 C14.2 L1.2 R2.2 R7.2 R9.2 R10.1 U1.1 U1.3 | length 1852.4
  Top1 w10: C14.2 -740,542 -719,563 U1.1 -653,563 -630,540 -630,512 -655,487 U1.3 ; -305,99 -222,16 -127,16 -104,39 -104,203 v1(-92,215) -75,198 v1(-75,196)
  Top1 w15: L1.2@-741.14,315 -733,315 -655,315 ; U1.3 -655,480 -655,315 ; R10.1 C11.1 -245,113 -259,99 -305,99 -316,110 -316,128 -338,150 -490,150 -655,315
  Bottom2 w10: R2.2 -746.22,372.22 R9.2 ; v1(-92,215) -65,188 69,188 106,225 R7.2
  other v1: -758,286 -733,286 -758,310 -733,310 -758,334 -733,334
VCC_IN: D1.1 pad.@-160,140 | length 202.3
  Top1 w35: pad.@-160,140 -160,215 D1.1
VDD_USB: J1.A4 J1.A9 J1.B4 J1.B9 R1.1 U2.7 U2.8 | length 1255.9
  Top1 w6: v1(197,792) 226,792 246,772 285,772 353,840 477,840 500,863 500,918.5
  Top1 w10: v1(155,598) 212,655 v1(212,747) ; U2.7 500,918.5 511.5,930 U2.8 R1.1@564.06,950.94
  Bottom2 w6: J1.B9 98.79,679.21 108,670 197,670 212,685 v1(212,747) 212,777 v1(197,792)
  Bottom2 w10: J1.A9 J1.B4 58.21,580.79 64,575 133,575 155,597 v1(155,598) ; J1.A4 J1.B9
VREF_2V5: C9.2 C10.2 R8.2 R19.3 R20.1 U5.1 U5.2 | length 1911.7
  Top1 w10: v1(-663,623) -637,649 -549,649 R8.2 v1(-473.33,590) -456.65,590 U5.1 U5.2 -317.8,492.6 -253.2,428 -168.8,428 -143,453.8 -143,532.2 -114,561.2 -114,652 -92,674 31,674 43,686 95,686 131,650 131,584 153,562 604,562 v1(664,622)
  Bottom2 w10: R20.1 -693.7,563.7 C9.2 ; C10.2 693.7,563.7 R19.3
pads on no net: A1. J1. J1.A2 J1.A3 J1.A8 J1.A10 J1.A11 J1.A12 J1.B2 J1.B3 J1.B8 J1.B10 J1.B11 J1.B12 R19. R20. U2.1 U2.2 U2.6 U2.10 U2.11 U2.12 U2.13 U2.14 U2.15 U2.16 U2.17 U2.18 U2.19 U2.20 U2.21 U2.22 U2.23 U2.27 U3.8 U6.5 U6.8 U7.26 U7.44 U7.45 U7.47 U7.48
copper on no net:
  other v1: -130,1135 -130,1160 -105,1160

## Polygon pours and split planes (outlines as drawn)
GND on Top1 "GND_L01_P000" (solid, remove dead copper, pour order 0): -780,1180 780,1180 780,0 -780,0
GND on Bottom2 "GND_L02_P001" (solid, remove dead copper, pour order 1): -780,1180 780,1180 780,0 -780,0

## Keep-outs
Keep-Out Layer:
  the board outline again, w10

## Other copper
Top1:
  pour cut-out: -140,1200 -140,960 -560,960 -560,1200
Bottom2:
  pour cut-out: -140,1200 -140,960 -560,960 -560,1200

## Silkscreen, mask and mechanical layers (free items; w line width, h text height)
Bottom Overlay:
  drawing of 1412 lines, arcs and shapes, not listed
Top Solder:
  rectangle: -560,960 -140,1200
  text "+" at -178.42,14.68 h100
  text "-" at 278.58,3.68 h100
Bottom Solder:
  rectangle: -560,960 -140,1200
Mechanical 1:
  circle w10: c393.7,708.66 r98.43
  circle w10: c-393.7,708.66 r98.43
  lines w10: -780,100 ccw(c-680,100) -680,0 680,0 ccw(c680,100) 780,100 780,1080 ccw(c680,1080) 680,1180 -680,1180 ccw(c-680,1080) -780,1080 -780,100 ; -437.72,748.03 ccw(c-393.7,708.66) -349.68,748.03 -437.72,748.03 ; 349.68,748.03 ccw(c393.7,708.66) 437.72,748.03 349.68,748.03
Drill Drawing:
  circle w10: c-674.38,2647.28 r33.33
  lines w10: -707.71,1747.28 -674.38,1713.94 -641.04,1747.28 -674.38,1780.61 -707.71,1747.28 ; -707.71,1863.94 -707.71,1880.61 -691.04,1897.28 -707.71,1913.94 -707.71,1930.61 -691.04,1930.61 -674.38,1913.94 -657.71,1930.61 -641.04,1930.61 -641.04,1913.94 -657.71,1897.28 -641.04,1880.61 -641.04,1863.94 -657.71,1863.94 -674.38,1880.61 -691.04,1863.94 -707.71,1863.94 ; -707.71,2030.61 -691.04,2030.61 -674.38,2013.94 -657.71,2030.61 -641.04,2030.61 -657.71,2047.28 -641.04,2063.94 -657.71,2063.94 -674.38,2080.61 -691.04,2063.94 -707.71,2063.94 -691.04,2047.28 -707.71,2030.61 ; -707.71,2180.61 -691.04,2180.61 -691.04,2163.94 -657.71,2163.94 -657.71,2180.61 -641.04,2180.61 -641.04,2213.94 -657.71,2213.94 -657.71,2230.61 -691.04,2230.61 -691.04,2213.94 -707.71,2213.94 -707.71,2180.61 ; -707.71,2380.61 -641.04,2380.61 -674.38,2313.94 -707.71,2380.61 ; -707.71,2463.94 -674.38,2480.61 -641.04,2463.94 -657.71,2497.28 -641.04,2530.61 -674.38,2513.94 -707.71,2530.61 -691.04,2497.28 -707.71,2463.94 ; -707.71,2763.94 -641.04,2763.94 -641.04,2830.61 -707.71,2830.61 -707.71,2763.94
  lines w15: -767.5,1668.94 12470.78,1668.94 ; -767.5,2868.94 12470.78,2868.94 ; -216.62,1518.94 -216.62,3018.94 ; 373.22,1518.94 373.22,3018.94 ; 1472.9,1518.94 1472.9,3018.94 ; 1978.78,1518.94 1978.78,3018.94 ; 2712.58,1518.94 2712.58,3018.94 ; 3902.23,1518.94 3902.23,3018.94 ; 4492.08,1518.94 4492.08,3018.94 ; 5237.88,1518.94 5237.88,3018.94 ; 6447.52,1518.94 6447.52,3018.94 ; 7301.29,1518.94 7301.29,3018.94 ; 8634.89,1518.94 8634.89,3018.94 ; 9968.5,1518.94 9968.5,3018.94 ; 11068.18,1518.94 11068.18,3018.94 ; -767.5,1518.94 12470.78,1518.94 12470.78,3018.94 -767.5,3018.94 -767.5,1518.94
  text "Symbol" at -677.5,2913.94 h72
  text "Count" at -171.62,2913.94 h72
  text "Hole Size" at 418.22,2913.94 h72
  text "Plated" at 1517.9,2913.94 h72
  text "Hole Type" at 2023.78,2913.94 h72
  text "Drill Layer Pair" at 2757.58,2913.94 h72
  text "Via/Pad" at 3947.23,2913.94 h72
  text "Pad Shape" at 4537.08,2913.94 h72
  text "Template" at 5282.88,2913.94 h72
  text "Description" at 6492.52,2913.94 h72
  text "Hole Tolerance (+)" at 7346.29,2913.94 h72
  text "Hole Tolerance (-)" at 8679.89,2913.94 h72
  text "Hole Length" at 10013.5,2913.94 h72
  text "Routed Path Length" at 11113.18,2913.94 h72
  text "1" at -171.62,2763.94 h60
  text "22.84mil (0.580mm)" at 418.22,2763.94 h60
  text "NPTH" at 1517.9,2763.94 h60
  text "Round" at 2023.78,2763.94 h60
  text "Top1 - Bottom2" at 2757.58,2763.94 h60
  text "Pad" at 3947.23,2763.94 h60
  text "Rounded" at 4537.08,2763.94 h60
  text "c58hn58" at 5282.88,2763.94 h60
  text "-" at 10013.5,2763.94 h60
  text "-" at 11113.18,2763.94 h60
  text "1" at -171.62,2613.94 h60
  text "25.98mil (0.660mm)" at 418.22,2613.94 h60
  text "NPTH" at 1517.9,2613.94 h60
  text "Round" at 2023.78,2613.94 h60
  text "Top1 - Bottom2" at 2757.58,2613.94 h60
  text "Pad" at 3947.23,2613.94 h60
  text "Rounded" at 4537.08,2613.94 h60
  text "c66hn66" at 5282.88,2613.94 h60
  text "-" at 10013.5,2613.94 h60
  text "-" at 11113.18,2613.94 h60
  text "4" at -171.62,2463.94 h60
  text "19.69mil (0.500mm)" at 418.22,2463.94 h60
  text "PTH" at 1517.9,2463.94 h60
  text "Slot" at 2023.78,2463.94 h60
  text "Top1 - Bottom2" at 2757.58,2463.94 h60
  text "Pad" at 3947.23,2463.94 h60
  text "Rounded" at 4537.08,2463.94 h60
  text "r300_150h50_200r100" at 5282.88,2463.94 h60
  text "78.74mil (2.000mm)" at 10013.5,2463.94 h60
  text "59.06mil (1.500mm)" at 11113.18,2463.94 h60
  text "4" at -171.62,2313.94 h60
  text "27.56mil (0.700mm)" at 418.22,2313.94 h60
  text "PTH" at 1517.9,2313.94 h60
  text "Round" at 2023.78,2313.94 h60
  text "Top1 - Bottom2" at 2757.58,2313.94 h60
  text "Pad" at 3947.23,2313.94 h60
  text "Rounded" at 4537.08,2313.94 h60
  text "c120h70" at 5282.88,2313.94 h60
  text "-" at 10013.5,2313.94 h60
  text "-" at 11113.18,2313.94 h60
  text "4" at -171.62,2163.94 h60
  text "86.61mil (2.200mm)" at 418.22,2163.94 h60
  text "PTH" at 1517.9,2163.94 h60
  text "Round" at 2023.78,2163.94 h60
  text "Top1 - Bottom2" at 2757.58,2163.94 h60
  text "Pad" at 3947.23,2163.94 h60
  text "Rounded" at 4537.08,2163.94 h60
  text "c300h220" at 5282.88,2163.94 h60
  text "-" at 10013.5,2163.94 h60
  text "-" at 11113.18,2163.94 h60
  text "8" at -171.62,2013.94 h60
  text "43.31mil (1.100mm)" at 418.22,2013.94 h60
  text "PTH" at 1517.9,2013.94 h60
  text "Round" at 2023.78,2013.94 h60
  text "Top1 - Bottom2" at 2757.58,2013.94 h60
  text "Pad" at 3947.23,2013.94 h60
  text "Rounded" at 4537.08,2013.94 h60
  text "c0h110" at 5282.88,2013.94 h60
  text "-" at 10013.5,2013.94 h60
  text "-" at 11113.18,2013.94 h60
  text "9" at -171.62,1863.94 h60
  text "15.75mil (0.400mm)" at 418.22,1863.94 h60
  text "PTH" at 1517.9,1863.94 h60
  text "Round" at 2023.78,1863.94 h60
  text "Top1 - Bottom2" at 2757.58,1863.94 h60
  text "Via" at 3947.23,1863.94 h60
  text "Rounded" at 4537.08,1863.94 h60
  text "v60h40m0mx0" at 5282.88,1863.94 h60
  text "-" at 10013.5,1863.94 h60
  text "-" at 11113.18,1863.94 h60
  text "164" at -171.62,1713.94 h60
  text "10.00mil (0.254mm)" at 418.22,1713.94 h60
  text "PTH" at 1517.9,1713.94 h60
  text "Round" at 2023.78,1713.94 h60
  text "Top1 - Bottom2" at 2757.58,1713.94 h60
  text "Via" at 3947.23,1713.94 h60
  text "Rounded" at 4537.08,1713.94 h60
  text "v46h25m0mx0" at 5282.88,1713.94 h60
  text "-" at 10013.5,1713.94 h60
  text "-" at 11113.18,1713.94 h60
  text "195 Total" at -171.62,1563.94 h60
  text "Slot definitions :" at -677.5,1418.97 h60
  text "Routed Path Length" at 355.19,1418.97 h60
  text "= Calculated from tool start centre position to tool end centre position." at 1457.86,1418.97 h60
  text "Hole Length" at 355.19,1318.99 h60
  text "= Routed Path Length + Tool Size = Slot length as defined in the PCB layout" at 1047.99,1318.99 h60